# Altium PCB main.PcbDoc (part 1 of 2)
Units mm, origin at the board's own origin, x right, y up, seen from the top; angles counter-clockwise.
Board outline 137 x 49 mm, 4 copper layers (Top Layer, Layer 1, Layer 2, Bottom Layer), stack 0.569 mm thick; 56 components, 56 nets, 326 pads, 215 vias.
Unrouted connection lines stored in the file: 1.
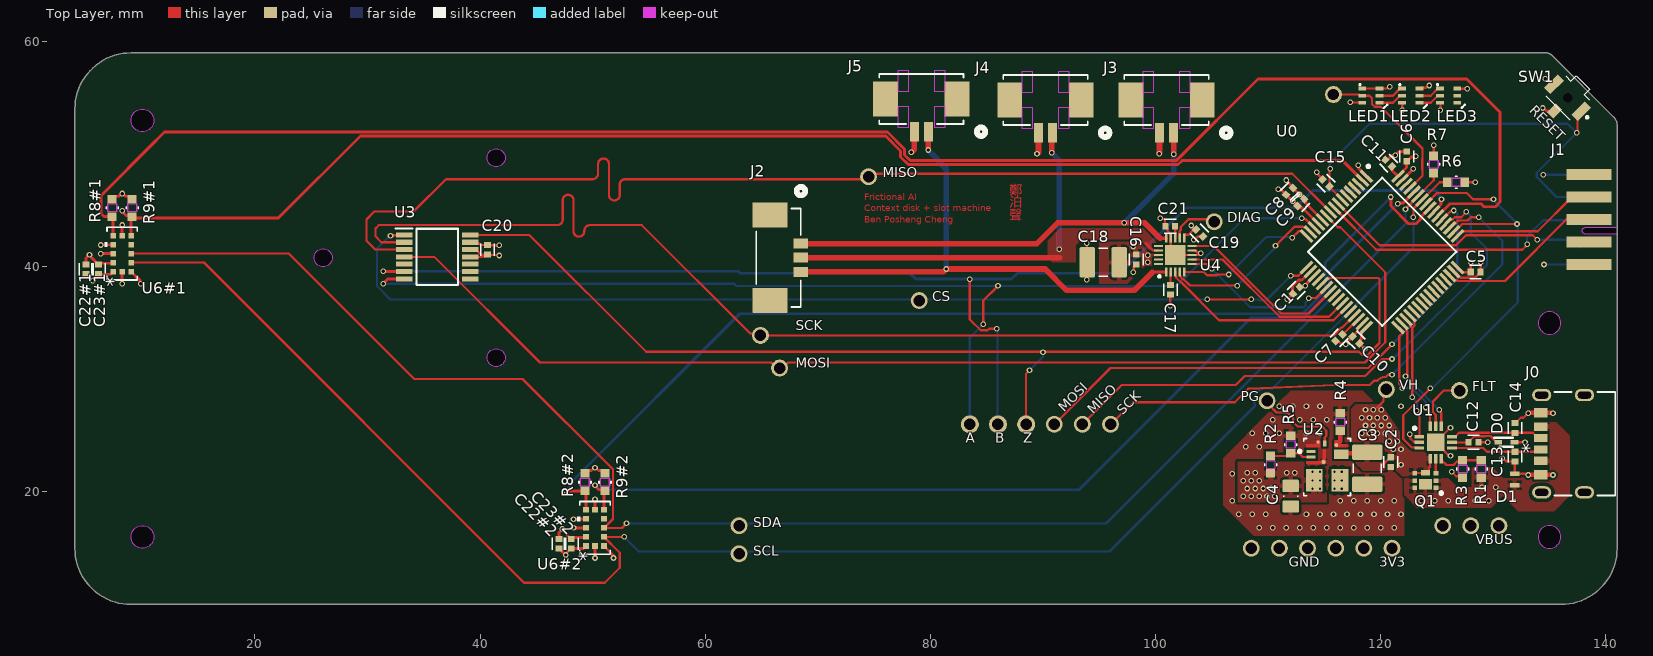
[diagram p0: Top Layer view]
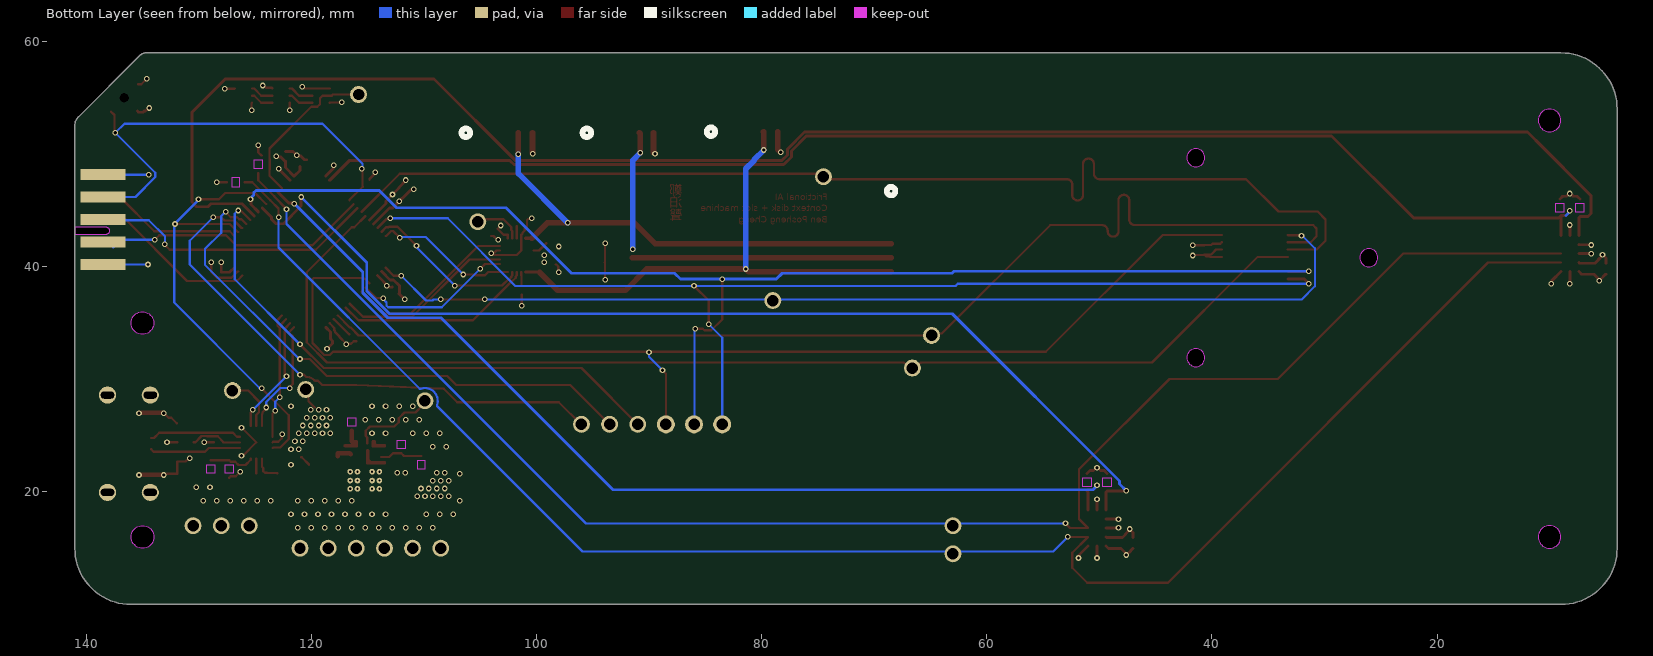
[diagram p1: Bottom Layer view, seen from below]
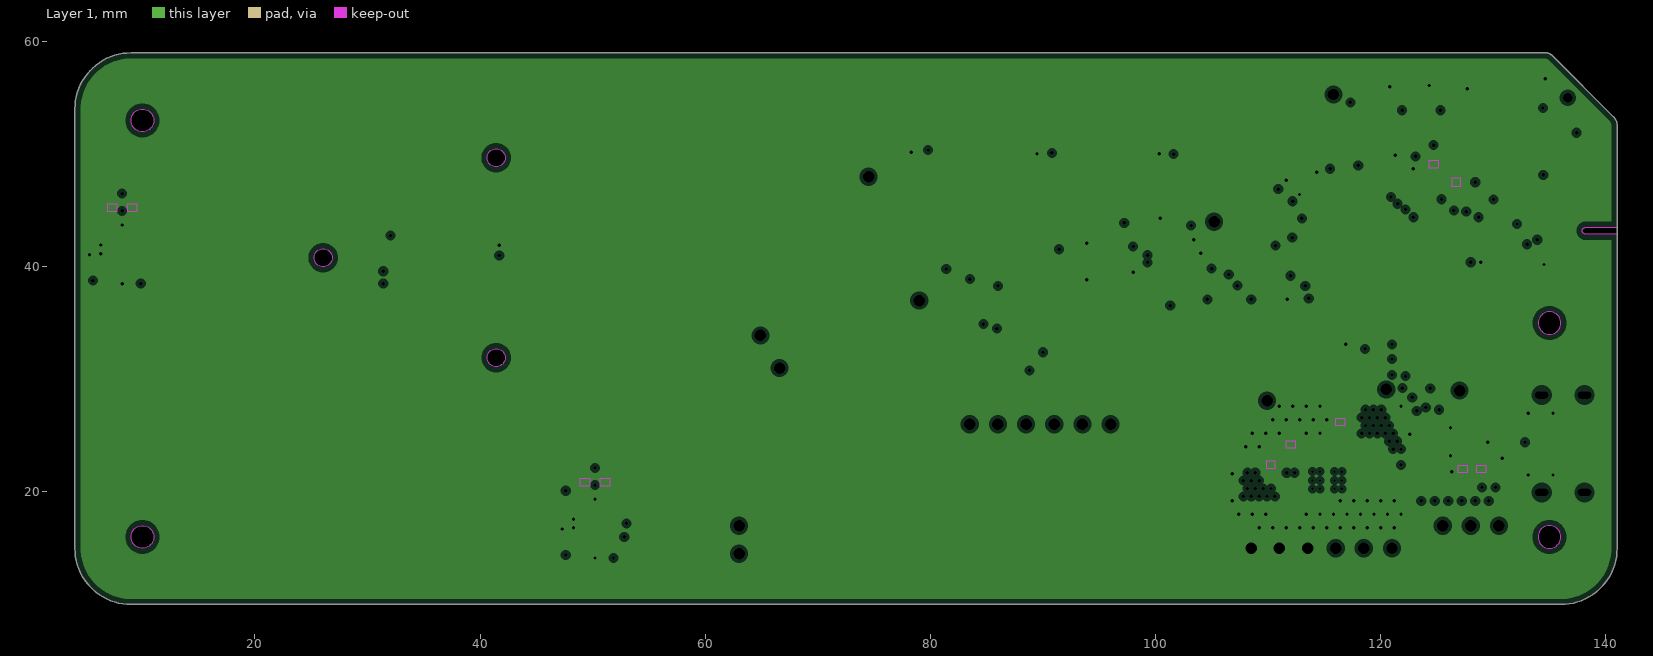
[diagram p2: Layer 1, clearances drawn from the general rule]
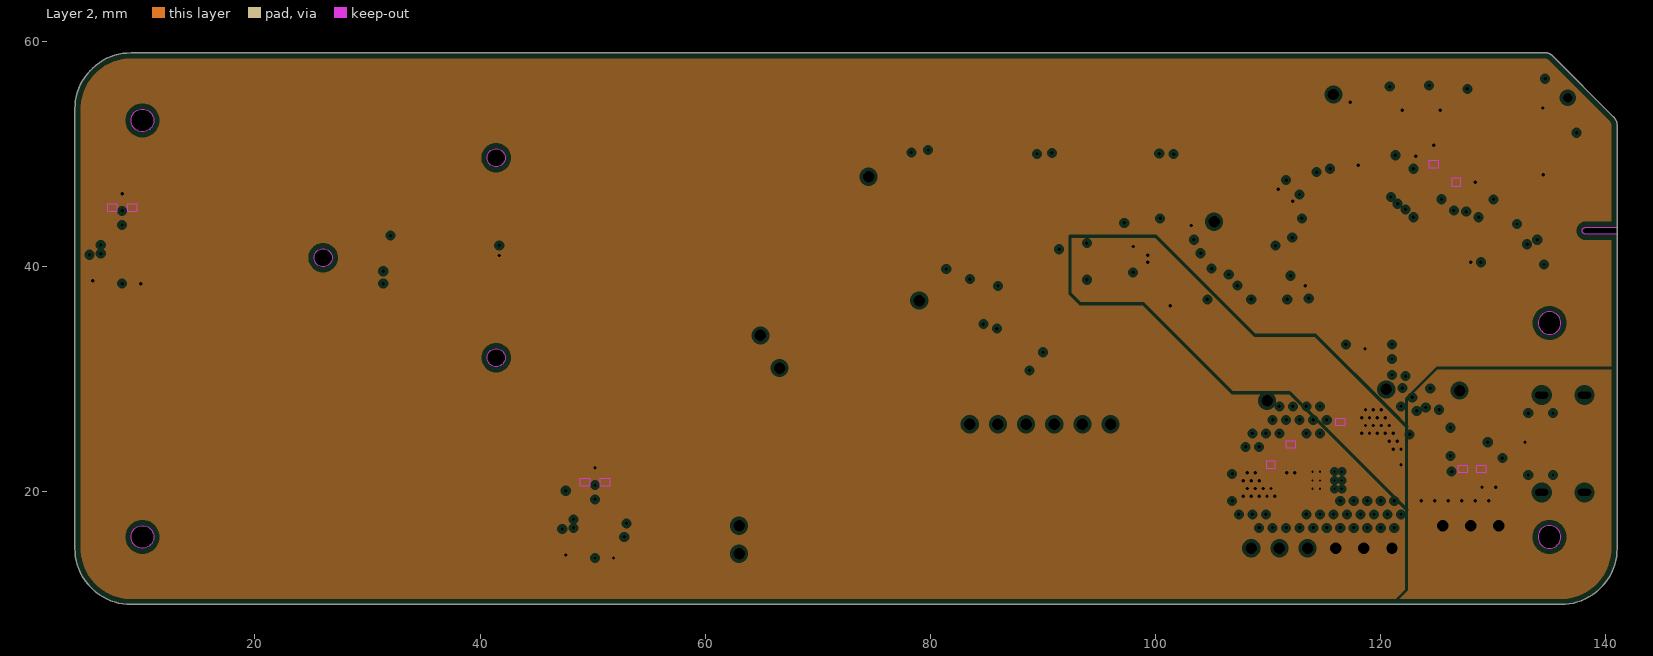
[diagram p3: Layer 2, clearances drawn from the general rule]
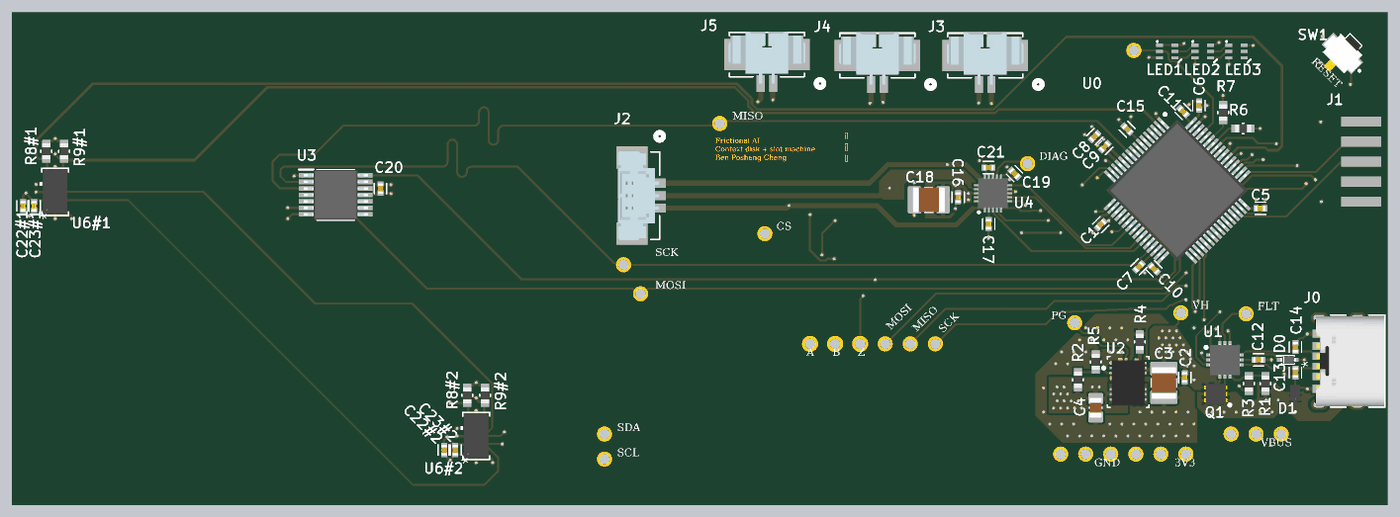
[diagram p4: 3D render of the assembled board from above, using the file's embedded part models]

## Layer stack, top to bottom
Top Solder: solder mask 0.0102, Solder Resist, Dk 3.5
Top Layer: signal copper 0.0356
Dielectric 2: prepreg 0.0711, PP-006, Dk 4.1
Layer 1: plane copper 0.018, net GND
Dielectric 1: dielectric 0.32, FR-4, Dk 4.8
Layer 2: plane copper 0.018, net (Multiple Nets)
Dielectric 5: prepreg 0.0711, PP-006, Dk 4.1
Bottom Layer: signal copper 0.0356
Bottom Solder: solder mask 0.0102, Solder Resist, Dk 3.5

## Board outline
9,10 136,10 ccw(c136,15) 141,15 141,52.559 ccw(c139.934,52.559) 140.688,53.312 135.241,58.759 ccw(c134.659,58.176) 134.659,59 9,59 ccw(c9,54) 4,54 4,15 ccw(c9,15)
cut-out: 10,52 cw(c10,53) 9,53 cw(c10,53) 10,54 cw(c10,53) 11,53 cw(c10,53)
cut-out: 10,15 cw(c10,16) 9,16 cw(c10,16) 10,17 cw(c10,16) 11,16 cw(c10,16)
cut-out: 133.981,15.996 ccw(c134.986,15.996) 134.986,14.991 ccw(c134.986,15.996) 135.991,15.996 ccw(c134.986,15.996) 134.986,17.001 ccw(c134.986,15.996)
cut-out: 134,35 ccw(c135,35) 135,34 ccw(c135,35) 136,35 ccw(c135,35) 135,36 ccw(c135,35)
cut-out: 41.424,31.126 cw(c41.424,31.926) 40.624,31.926 cw(c41.424,31.926) 41.424,32.726 cw(c41.424,31.926) 42.224,31.926 cw(c41.424,31.926)
cut-out: 26.052,40.002 cw(c26.052,40.802) 25.252,40.802 cw(c26.052,40.802) 26.052,41.602 cw(c26.052,40.802) 26.852,40.802 cw(c26.052,40.802)
cut-out: 41.421,48.881 cw(c41.421,49.681) 40.621,49.681 cw(c41.421,49.681) 41.421,50.481 cw(c41.421,49.681) 42.221,49.681 cw(c41.421,49.681)

## Design rules (kind name [scope] priority, off if disabled: settings)
BoardOutlineClearance [All] p1: gap=1 ignorepadtopadclearanceinfootprint=FALSE
Clearance [All] p1: gap=0.2 ignorepadtopadclearanceinfootprint=TRUE except(0.1: Track-Track Track-SMDPad; 0.15: SMDPad-SMDPad; 0.28: Track-THPad Track-Hole; 0.3: THPad-Fill THPad-Poly THPad-Region; 0.45: THPad-THPad)
HoleSize [All] p1: absolutevalues=TRUE maxlimit=6.3 minlimit=0.15 maxpercent=80.000 minpercent=20.000
MatchedLengths I2C [InNet('SCL') or InNet('SDA')] p1: tolerance=8 checknetsindiffpair=FALSE checkdiffpairvsdiffpair=TRUE checkxsignals=TRUE checkothers=TRUE
MatchedLengths SPI [InNetClass('SPI')] p2: tolerance=8 checknetsindiffpair=FALSE checkdiffpairvsdiffpair=TRUE checkxsignals=TRUE checkothers=TRUE
MinimumAnnularRing [not isvia] p1: minimumring=0.2
MinimumSolderMaskSliver [All] p1: minsoldermaskwidth=0.1
PlaneClearance [All] p1: clearance=0.3
PlaneConnect [All] p1: pad.planeconnectstyle=Relief pad.reliefexpansion=0.2 pad.reliefentries=4 pad.reliefconductorwidth=0.3 pad.reliefairgap=0.3 via.planeconnectstyle=Direct via.reliefexpansion=0.508 via.reliefentries=4 via.reliefconductorwidth=0.254 via.reliefairgap=0.254
PolygonConnect PolygonConnect_PWR [InNet('VBUS') or InNet('VH') or InNet('GND')] p1: thpad.connectstyle=Relief thpad.reliefconductorwidth=0.254 thpad.reliefentries=4 thpad.polygonreliefangle="90 Angle" thpad.airgapwidth=0.254 smdpad.connectstyle=Relief smdpad.reliefconductorwidth=0.4 smdpad.reliefentries=4 smdpad.polygonreliefangle="90 Angle" smdpad.airgapwidth=0.2 via.connectstyle=Direct via.reliefconductorwidth=0.254 via.reliefentries=4 via.polygonreliefangle="90 Angle" via.airgapwidth=0.254
PolygonConnect PolygonConnect_3V3 [InNet('3V3')] p2: thpad.connectstyle=Relief thpad.reliefconductorwidth=0.254 thpad.reliefentries=4 thpad.polygonreliefangle="90 Angle" thpad.airgapwidth=0.254 smdpad.connectstyle=Relief smdpad.reliefconductorwidth=0.45 smdpad.reliefentries=4 smdpad.polygonreliefangle="45 Angle" smdpad.airgapwidth=0.2 smdpad.conductorbypadedge=TRUE smdpad.mindistance=0.381 smdpad.enablemindistance=FALSE via.connectstyle=Direct via.reliefconductorwidth=0.254 via.reliefentries=4 via.polygonreliefangle="90 Angle" via.airgapwidth=0.254
PolygonConnect [All] p3: thpad.connectstyle=Relief thpad.reliefconductorwidth=0.254 thpad.reliefentries=4 thpad.polygonreliefangle="90 Angle" thpad.airgapwidth=0.254 smdpad.connectstyle=Relief smdpad.reliefconductorwidth=0.254 smdpad.reliefentries=4 smdpad.polygonreliefangle="90 Angle" smdpad.airgapwidth=0.254 smdpad.conductorbypadedge=TRUE smdpad.mindistance=0.381 smdpad.enablemindistance=FALSE via.connectstyle=Direct via.reliefconductorwidth=0.254 via.reliefentries=4 via.polygonreliefangle="90 Angle" via.airgapwidth=0.254
RoomDefinition TOF1 [InComponentClass('TOF1')] p1: confinementstyle=ConfineIn formatcopy=TRUE lockcomponents=FALSE outline 3.974,37.829 10.197,37.829 10.197,46.973 3.974,46.973
RoomDefinition bldc [InComponentClass('bldc')] p2: confinementstyle=ConfineIn formatcopy=TRUE lockcomponents=FALSE outline 31.985,37.798 31.985,43.956 74.336,57.651 85.385,57.651 107.16,57.556 107.16,50.465 105.428,42.79 104.144,38.632 102.254,36.735 69.728,35.311 63.612,35.311
RoomDefinition power [InComponentClass('power')] p3: confinementstyle=ConfineIn formatcopy=TRUE lockcomponents=FALSE outline 106.8,15.7 141.732,15.7 141.732,59.817 106.8,59.817
RoomDefinition TOF2 [InComponentClass('TOF2')] p4: confinementstyle=ConfineIn formatcopy=TRUE lockcomponents=FALSE outline 45.974,13.462 52.197,13.462 52.197,22.606 45.974,22.606
RoutingVias [All] p1: holewidth=0.3 width=0.5 viastyle="Through Hole" minholewidth=0.15 minwidth=0.25 maxholewidth=0.711 maxwidth=1.27
SilkToSilkClearance [All] p1: silktosilkclearance=0
SilkToSolderMaskClearance [IsPad] p1: minsilkscreentomaskgap=0.15 clearancetoexposedcopper=FALSE
SolderMaskExpansion SolderMaskExpansionVia [IsVia] p1: expansion=0 istentingtop=TRUE
SolderMaskExpansion [All] p2: expansion=0 istentingtop=FALSE
SupplyNets "Schematic Supply Nets_3" [InNet('3V3')] p1: voltage=0.000
SupplyNets "Schematic Supply Nets_2" [InNet('VH')] p2: voltage=0.000
SupplyNets "Schematic Supply Nets_1" [InNet('VBUS')] p3: voltage=0.000
SupplyNets "Schematic Supply Nets" [InNet('GND')] p4: voltage=0.000
Width [All] p1: maxlimit=1 minlimit=0.1 preferedwidth=0.2
24 further rules are at their usual default settings.

## Classes and differential pairs
net class SPI: NetU0_10 NetU0_11 NetU0_29
channel class tof: tof1 tof2
component class tof2: C22#2 C23#2 R8#2 R9#2 U6#2
component class tof1: C22#1 C23#1 R8#1 R9#1 U6#1
component class main: R6 R7
component class POWER: C1 C2 C3 C4 C5 C6 C7 C8 C9 C10 C11 C12 C13 C14 C15 D0 D1 J0 J1 LED1 LED2 LED3 Q1 R1 R2 R3 R4 R5 SW1 U0 U1 U2
component class bldc: C16 C17 C18 C19 C20 C21 J2 J3 J4 J5 U3 U4

## Components (designator, comment, footprint, x,y, rotation, side; value= is the part's Value field where it differs from the comment)
C1 "100n" CAPC1005X55N 112.5,37.9 r45 top
C2 "100n" CAPC1005X55N 120.879,22.649 r90 top
C3 "10u" CAPC3225X270N 118.8,22.1 r90 top
C4 "47u" CAPC2012X145N 111.999,19.623 r90 top
C5 "100n" CAPC1005X55N 128.423,39.53 r180 top
C6 "100n" CAPC1005X55N 122.3,49.8 r270 top
C7 "4.7u" CAPC1005X55N 116.299,33.693 r45 top
C8 "100n" CAPC1005X55N 111.9,46.7 r225 top
C9 "1u" CAPC1005X55N 112.9,45.7 r225 top
C10 "100n" CAPC1005X55N 117.8,33.5 r315 top
C11 "10u" CAPC1005X55N 120.704,49.196 r315 top
C12 "100n" CAPC1005X55N 128.237,24.407 r180 top
C13 "330p" CAPC1005X55N 131.92,23.137 r90 top
C14 "330p" CAPC1005X55N 131.92,25.677 r270 top
C15 "100n" CAPC1005X55N 115.132,47.432 r315 top
C16 "100n" CAPC1005X55N 98.273,40.641 r270 top
C17 "100n" CAPC1005X55N 101.321,37.964 r270 top
C18 "10u" CAPC3225X270N 95.352,40.387 r180 top
C19 "100n" CAPC1005X55N 103.9,43 r135 top
C20 "100n" CAPC1005X55N 40.657,41.511 r270 top
C21 "100n" CAPC1005X55N 101.3,43.6 r0 top
C22#1 "4.7u" CAPC1005X55N 5,39.767 r270 top (schematic designator C22)
C22#2 "4.7u" CAPC1005X55N 47,15.4 r270 top (schematic designator C22)
C23#1 "100n" CAPC1005X55N 6.1,39.767 r270 top (schematic designator C23)
C23#2 "100n" CAPC1005X55N 48.1,15.4 r270 top (schematic designator C23)
D0 "BAT54KFILM" SODFL1608X70N 131.158,24.407 r0 top
D1 "ESDA25P35-1U1M" QFN1610_STM 131.9,21.1 r90 top
J0 "2171750001" 2171750001_MOL 137.254,24.28 r90 top
J1 "STLINKV3MINIE" 009159010061911 135,49.2 r270 top
J2 "533980371" CONN_53398_03_MOL 66.5,40.8 r90 top
J3 "532610271" CONN_532610001-SD_02_MOL 100.975,54.805 r0 top
J4 "532610271" CONN_532610001-SD_02_MOL 90.225,54.805 r0 top
J5 "532610271" CONN_532610001-SD_02_MOL 79.2,54.9 r0 top
LED1 "WS2816A-2121" ws2816a-2121 118.01,52.83 r0 top
LED2 "WS2816A-2121" ws2816a-2121 121.55,52.83 r0 top
LED3 "WS2816A-2121" ws2816a-2121 124.91,52.83 r0 top
Q1 "DMT35M4LFDF" "U-DFN2020-6 (TYPE F)" 125.11,20.15 r90 top
R1 "10k" RC0603N_YAG 128.928,22.036 r90 top
R2 "45.3k" RC0603N_YAG 110.221,22.417 r90 top
R3 "475" RC0603N_YAG 127.277,22.036 r270 top
R4 "18k" RC0603N_YAG 116.4,26.2 r90 top
R5 "10k" RC0603N_YAG 112,24.2 r90 top
R6 "1.5k" RC0603N_YAG 126.7,47.5 r180 top
R7 "1.5k" RC0603N_YAG 124.7,49.1 r270 top
R8#1 "10k" RC0603N_YAG 7.311,45.231 r270 top (schematic designator R8)
R8#2 "10k" RC0603N_YAG 49.311,20.864 r270 top (schematic designator R8)
R9#1 "10k" RC0603N_YAG 9.089,45.231 r270 top (schematic designator R9)
R9#2 "10k" RC0603N_YAG 51.089,20.864 r270 top (schematic designator R9)
SW1 "B3U-3100P-B" B3U3000PB 136.598,55.002 r315 top
U0 "STM32U575RGT3" QFP50P1200X1200X160-64N 120.124,41.329 r315 top
U1 "TCPP01-M12" QFN50P300X300X100-13N-D 124.882,24.399 r0 top
U2 "TPSM84338RCJR" RCJ0009A-MFG 115.245,22.121 r0 top
U3 "AS5047P-ATSM" SOP65P640X120-14N 36.189,40.876 r0 top
U4 "TMC6300-LA" QFN40P300X300X90-21N 101.74,41.036 r90 top
U6#1 "VL53L0CXV0DH/1" LGA12_STM 8.2,41.167 r90 top (schematic designator U6)
U6#2 "VL53L0CXV0DH/1" LGA12_STM 50.2,16.8 r90 top (schematic designator U6)

## Footprints (in the part's own frame and the unit in brackets; to place one, negate y for a bottom-side part, rotate by r counter-clockwise, add the part's x,y. Pads: shape width x height; smd on the part's side, far side on the other; paste and mask are expansions set on the pad)
2171750001_MOL [mil]
  oval 43x67 / inner oval 43x67 / far side round 60 hole 47 slot 24 at 0 deg paste-99999 mask-33.5: 7(-170.08,116.31) 8(170.08,116.31) 9(-170.08,-33.29) 10(170.08,-33.29)
  rect 28x47 smd paste+0 mask+0: A5(-19.68,119.46) B5(19.69,119.46)
  rect 30x47 smd paste+0 mask+0: A9(59.84,119.46) B9(-59.84,119.46)
  rect 32x47 smd paste+0 mask+0: A12(108.27,119.46) B12(-108.27,119.46)
  silkscreen extent -181,-141 181,71, body extent -176,-139 176,133, height 125
009159010061911 [mm]
  rect 1x4 smd: 1(9,3.5) 2(7,3.5) 3(5,3.5) 4(3,3.5) 5(1,3.5)
  rect 1x4 smd far side: 6(9,3.5) 7(7,3.5) 8(5,3.5) 9(3,3.5) 10(1,3.5)
  Keep-Out Layer board cut-out: 5.7,6 6.3,6 6.3,3.2 6.27,3.07 6.187,2.965 6.067,2.908 5.933,2.908 5.813,2.965 5.73,3.07 5.7,3.2 5.7,3.2
B3U3000PB [mm]
  rect 0.8x1.7 smd: 1(1.7,0) 2(-1.7,0)
  rect 0.8x1.1 / inner round 0 / far side round 0 all layers, no hole: 3(0,-1.65)
  round 0.425 hole 0.85 unplated: 4(0,0)
  silkscreen extent -1.5,-1.25 2.55,1.95, body extent -1.97,-1.3 2.03,1.91, height 1.2
CAPC1005X55N [mm]
  rect 0.54x0.6 smd: 1(-0.43,0) 2(0.43,0)
  silkscreen extent -0.53,-0.62 0.53,0.62, body extent -0.51,-0.28 0.54,0.28, height 0.56
CAPC2012X145N [mm]
  rrect25% 1.1x1.48 smd: 1(-0.915,0) 2(0.915,0)
  silkscreen extent -0.05,-0.63 0.05,0.63, body extent -1,-0.63 1,0.63, height 1.45
CAPC3225X270N [mm]
  rrect25% 1.37x2.72 smd: 1(-1.42,0) 2(1.42,0)
  silkscreen extent -0.42,-1.25 0.42,1.25, body extent -1.6,-1.25 1.6,1.25, height 2.7
CONN_53398_03_MOL [mil]
  rect 35x51 smd paste+0 mask+0: 1(49.21,-78.57) 2(0,-78.57) 3(-49.21,-78.57)
  rect 87x122 smd paste+0 mask+0: 4(-149.61,29.69) 5(149.61,29.69)
  silkscreen extent -172,-94 248,78, body extent -175,-80 175,85, height 185
CONN_532610001-SD_02_MOL [mil]
  rect 32x67 smd paste+0 mask+0: 1(24.61,-114.35) 2(-24.61,-114.35)
  rect 87x122 smd paste+0 mask+0: 3(-125,-0.18) 4(125,-0.18)
  Top Layer keep-out region: 83.48,-27.67 44.48,-27.67 44.48,-98.67 83.48,-98.67
  Top Layer keep-out region: -44.48,-27.67 -83.48,-27.67 -83.48,-98.67 -44.48,-98.67
  Top Layer keep-out region: 83.48,98.32 44.48,98.32 44.48,27.32 83.48,27.32
  Top Layer keep-out region: -44.48,98.32 -83.48,98.32 -83.48,27.32 -44.48,27.32
  silkscreen extent -148,-129 223,88, body extent -151,-115 151,90, height 126
LGA12_STM [mm]
  rect 0.5x0.5 smd paste+0 mask+0: 1(-1.6,0.8) 2(-0.8,0.8) 3(0,0.8) 4(0.8,0.8) 5(1.6,0.8) 6(1.6,0) 7(1.6,-0.8) 8(0.8,-0.8) 9(0,-0.8) 10(-0.8,-0.8) 11(-1.6,-0.8) 12(-1.6,0)
  silkscreen extent -2.35,-1.35 2.35,1.56, body extent -2.22,-1.22 2.22,1.22, height 1.04
QFN40P300X300X90-21N [mm]
  rect 0.8x0.2 smd: 1(-1.5,0.8) 2(-1.5,0.4) 3(-1.5,0) 4(-1.5,-0.4) 5(-1.5,-0.8) 11(1.5,-0.8) 12(1.5,-0.4) 13(1.5,0) 14(1.5,0.4) 15(1.5,0.8)
  rect 0.2x0.8 smd: 6(-0.8,-1.5) 7(-0.4,-1.5) 8(0,-1.5) 9(0.4,-1.5) 10(0.8,-1.5) 16(0.8,1.5) 17(0.4,1.5) 18(0,1.5) 19(-0.4,1.5) 20(-0.8,1.5)
  rect 1.8x1.8 smd: 21(0,0)
  silkscreen extent -2,1.3 -1.8,1.5, body extent -1.55,-1.55 1.55,1.55, height 0.9
QFN50P300X300X100-13N-D [mm]
  rect 0.85x0.3 smd: 1(-1.45,0.5) 2(-1.45,0) 3(-1.45,-0.5) 7(1.45,-0.5) 8(1.45,0) 9(1.45,0.5)
  rect 0.3x0.85 smd: 4(-0.5,-1.45) 5(0,-1.45) 6(0.5,-1.45) 10(0.5,1.45) 11(0,1.45) 12(-0.5,1.45)
  rect 1.55x1.55 smd: 13(0,0)
  silkscreen extent -2,1.13 -1.75,1.37, body extent -1.55,-1.55 1.55,1.55, height 1
QFN1610_STM [mil]
  rect 16x33 smd paste+0 mask+0: 1(-20.5,0) 2(20.5,0)
  silkscreen extent -77,-3 -71,3, body extent -31,-19 31,19, height 24
QFP50P1200X1200X160-64N [mm]
  rect 1.475x0.3 smd: 1(-5.738,3.75) 2(-5.738,3.25) 3(-5.738,2.75) 4(-5.738,2.25) 5(-5.738,1.75) 6(-5.738,1.25) 7(-5.738,0.75) 8(-5.738,0.25) 9(-5.738,-0.25) 10(-5.738,-0.75) 11(-5.738,-1.25) 12(-5.738,-1.75) 13(-5.738,-2.25) 14(-5.738,-2.75) 15(-5.738,-3.25) 16(-5.738,-3.75) 33(5.738,-3.75) 34(5.738,-3.25) 35(5.738,-2.75) 36(5.738,-2.25) 37(5.738,-1.75) 38(5.738,-1.25) 39(5.738,-0.75) 40(5.738,-0.25) 41(5.738,0.25) 42(5.738,0.75) 43(5.738,1.25) 44(5.738,1.75) 45(5.738,2.25) 46(5.738,2.75) 47(5.738,3.25) 48(5.738,3.75)
  rect 0.3x1.475 smd: 17(-3.75,-5.738) 18(-3.25,-5.738) 19(-2.75,-5.738) 20(-2.25,-5.738) 21(-1.75,-5.738) 22(-1.25,-5.738) 23(-0.75,-5.738) 24(-0.25,-5.738) 25(0.25,-5.738) 26(0.75,-5.738) 27(1.25,-5.738) 28(1.75,-5.738) 29(2.25,-5.738) 30(2.75,-5.738) 31(3.25,-5.738) 32(3.75,-5.738) 49(3.75,5.738) 50(3.25,5.738) 51(2.75,5.738) 52(2.25,5.738) 53(1.75,5.738) 54(1.25,5.738) 55(0.75,5.738) 56(0.25,5.738) 57(-0.25,5.738) 58(-0.75,5.738) 59(-1.25,5.738) 60(-1.75,5.738) 61(-2.25,5.738) 62(-2.75,5.738) 63(-3.25,5.738) 64(-3.75,5.738)
  silkscreen extent -6.35,-4.65 4.65,4.65, body extent -6,-6 6,6, height 1.6
RC0603N_YAG [mil]
  rect 30x32 smd paste+0 mask+0: 1(-30.5,0) 2(30.5,0)
  Top Layer keep-out region: -13.5,-14 -13.5,14 13.5,14 13.5,-14
  Keep-Out Layer region: -13.5,-16 -13.5,16 13.5,16 13.5,-16
  silkscreen extent -3,-21 3,21, body extent -31,-16 31,16, height 28
RCJ0009A-MFG [mm]
  rect 0.8x0.25 smd paste+0 mask-0.381: 1(-1.45,1.475) 2(-1.45,0.975)
  round 0.348 smd paste-0.161 mask-0.165: 3(-0.319,0.532)
  round 0.5 / inner round 1.524 / far side round 0.5 hole 0.203 paste-2539.97 mask-0.241: 4(-1.3,-1.85) 4(-1.3,-1.113) 4(-1.3,-0.325) 4(-0.65,-1.85) 4(-0.65,-1.113) 4(-0.65,-0.325) 5(0.65,-1.85) 5(0.65,-1.113) 5(0.65,-0.325) 5(1.3,-1.85) 5(1.3,-1.113) 5(1.3,-0.325)
  rect 1.5x2.025 smd paste-1 mask-1.003: 4(-1.15,-1.088) 5(1.15,-1.088)
  rect 1.3x0.85 smd paste-0.637 mask-0.635: 6(1.25,1.225)
  round 0.337 smd paste+0 mask-0.152: 7(0.812,2.037)
  rect 0.3x0.55 smd paste+0 mask-0.267: 8(-0.225,2.175)
  round 0.27 smd paste+0 mask-0.127: 9(-0.8,2.3)
  Top Layer region: -0.675,1.85 -1.8,1.85 -1.85,1.9 -1.85,2.05 -1.8,2.1 -1.075,2.1 -0.975,2.2 -0.975,2.4 -0.925,2.45 -0.675,2.45 -0.625,2.4 -0.625,1.9
  Top Layer region: -0.175,0.326 -1.8,0.325 -1.85,0.375 -1.85,0.55 -1.8,0.6 -0.606,0.6 -0.536,0.63 -0.404,0.761 -0.375,0.832 -0.375,1.6 -0.325,1.65 -0.175,1.65 -0.125,1.6 -0.125,0.376
  Top Layer region: 0.675,1.85 1.8,1.85 1.85,1.9 1.85,2.05 1.8,2.1 1.075,2.1 0.975,2.2 0.975,2.4 0.925,2.45 0.675,2.45 0.625,2.4 0.625,1.9
  silkscreen extent -2.57,-2.47 2.07,2.63, body extent -1.65,-2.25 1.65,2.25, height 2.05
SODFL1608X70N [mm]
  rect 0.7x0.42 smd: 1(-0.725,0) 2(0.725,0)
  silkscreen extent -1.07,-0.4 0.6,0.4, body extent -0.76,-0.4 0.84,0.4, height 0.7
SOP65P640X120-14N [mm]
  rect 1.475x0.45 smd: 1(-2.938,1.95) 2(-2.938,1.3) 3(-2.938,0.65) 4(-2.938,0) 5(-2.938,-0.65) 6(-2.938,-1.3) 7(-2.938,-1.95) 8(2.938,-1.95) 9(2.938,-1.3) 10(2.938,-0.65) 11(2.938,0) 12(2.938,0.65) 13(2.938,1.3) 14(2.938,1.95)
  silkscreen extent -3.67,-2.5 1.85,2.52, body extent -3.2,-2.5 3.2,2.5, height 1.2
"U-DFN2020-6 (TYPE F)" [mm]
  rect 0.4x0.425 / inner rect 0x0 / far side rect 0x0 all layers, no hole: D(0.2,2.09) D(0.2,0.21) D(0.85,2.09) D(0.85,0.21) G(1.5,0.21) S(1.5,2.09)
  rect 0.95x1.15 / inner rect 0x0 / far side rect 0x0 all layers, no hole mask+0: D(0.52,1.15)
  rect 0.48x0.8 / inner rect 0x0 / far side rect 0x0 all layers, no hole: S(1.54,1.15)
  silkscreen extent -0.38,-0.38 -0.13,-0.13, body extent -0.15,0.15 1.85,2.15, height 0.6
ws2816a-2121 [mm]
  rect 0.7x0.32 smd: 1(0.35,3) 2(0.35,2.37) 3(0.35,1.74) 4(1.89,1.74) 5(1.89,2.37) 6(1.89,3)
  silkscreen extent 0.12,1.27 2.56,3.37

## Part data
C1 C2 C5 C6 C8 C10 C12 C15 C16 C17 C19 C20 C21 C23#1 C23#2: library part UMK105B7104KVHF, "CAP CER 0.1UF 50V X7R 0402", Package=None, Availability=Unavailable, Manufacturer_Part_Number=UMK105B7104KVHF, MF="{'manufacturer': u'Taiyo Yuden'}", MP=UMK105B7104KVHF, Price=None
C3 C18: library part MSASU32MSB5106KPNA01, "CAP CER 10UF 50V X5R 1210", Package=None, Availability=Unavailable, Manufacturer_Part_Number=MSASU32MSB5106KPNA01, MF="{'manufacturer': u'Taiyo Yuden'}", MP=MSASU32MSB5106KPNA01, Price=None
C4: library part MSASL21GBB5476MTNA01, "CAP CER 47UF 10V X5R 0805", Package=None, Availability=Unavailable, Manufacturer_Part_Number=MSASL21GBB5476MTNA01, MF="{'manufacturer': u'Taiyo Yuden'}", MP=MSASL21GBB5476MTNA01, Price=None
C7 C22#1 C22#2: library part GRM155R60J475M, "CAP CER 4.7UF 6.3V X5R 0402", Package=None, Availability=Unavailable, Manufacturer_Part_Number=GRM155R60J475M, MF="{'manufacturer': u'Taiyo Yuden'}", MP=GRM155R60J475M, Price=None
C9: library part GRM155R60J105K, "CAP CER 1UF 6.3V X5R 0402", Package=None, Availability=Unavailable, Manufacturer_Part_Number=GRM155R60J105K, MF="{'manufacturer': u'Taiyo Yuden'}", MP=GRM155R60J105K, Price=None
C11: library part GRM155R60J106M, "CAP CER 10UF 6.3V X5R 0402", Package=None, Availability=Unavailable, Manufacturer_Part_Number=GRM155R60J106M, MF="{'manufacturer': u'Taiyo Yuden'}", MP=GRM155R60J106M, Price=None
C13 C14: library part MCASU105SCG331JFNA01, "CAP CER 330PF 50V C0G 0402", Package=None, Availability=Unavailable, Manufacturer_Part_Number=MCASU105SCG331JFNA01, MF="{'manufacturer': u'Taiyo Yuden'}", MP=MCASU105SCG331JFNA01, Price=None
D0: "BAT54KFILM, Schottky Diode,  0.3A max, 40V 5ns, 2-Pin, SOD-523", Manufacturer_Name=STMicroelectronics, Mouser Part Number=511-BAT54KFILM, Arrow Part Number=BAT54KFILM, Arrow Price/Stock=https://www.arrow.com/en/products/bat54kfilm/stmicroelectronics?region=europe, Datasheet Link=https://www.st.com/resource/en/datasheet/bat54.pdf, Geometry.Height=0.7mm, Manufacturer_Part_Number=BAT54KFILM, Mouser Price/Stock=https://www.mouser.co.uk/ProductDetail/STMicroelectronics/BAT54KFILM?qs=jZi1jxfVU95Y9ce6l3OT%252BA%3D%3D
D1: "35 A - 8/20 us, 22 V TVS in QFN-2L", Manufacturer_Name=STMicroelectronics, Copyright="Copyright (C) 2026 Ultra Librarian. All rights reserved.", Manufacturer_Part_Number=ESDA25P35-1U1M, RefDes=RefDes, Type=Type
J0: "Universal Serial Bus (USB) Shielded I/O Receptacle, Type C, Right-Angle,  Surface Mount, Top Mount, 6 Circuits, Gold (Au) Plating", Manufacturer_Name="Molex Connector Corporation", Copyright="Copyright (C) 2025 Ultra Librarian. All rights reserved.", Manufacturer_Part_Number=2171750001, RefDes=RefDes, Type=Type
J1: library part 009159010061911, "KYOCERA-AVX 009159010061911"
J2: "1.25mm Pitch, PicoBlade PCB Header, Single Row, Vertical, Surface Mount,  Tin (Sn) Plating, Friction Lock, 3 Circuits, Tape and Reel, 0.60mm PC Tail Length", Manufacturer_Name="Molex Connector Corporation", Copyright="Copyright (C) 2025 Ultra Librarian. All rights reserved.", Manufacturer_Part_Number=533980371, RefDes=RefDes, Type=Type
J3 J4 J5: "1.25mm Pitch, PicoBlade PCB Header, Single Row, Right-Angle, Surface Mount, Tin (Sn) Plating, Friction Lock, 2 Circuits, Natural, Tape and Reel", Manufacturer_Name="Molex Connector Corporation", Copyright="Copyright (C) 2025 Ultra Librarian. All rights reserved.", Manufacturer_Part_Number=532610271, RefDes=RefDes, Type=Type
R1 R5 R8#1 R8#2 R9#1 R9#2: library part RT0603BRD0710KL, "10K OHM 0.1% 1/10W 0603", Manufacturer_Name=Yageo, Copyright="Copyright (C) 2026 Ultra Librarian. All rights reserved.", Manufacturer_Part_Number=RT0603BRD0710KL
R2: library part RT0603BRD0745K3L, "45.3K OHM 0.1% 1/10W 0603", Manufacturer_Name=Yageo, Copyright="Copyright (C) 2026 Ultra Librarian. All rights reserved.", Manufacturer_Part_Number=RT0603BRD0745K3L
R3: library part RT0603BRE07475RL, "475 OHM 0.1% 1/10W 0603", Manufacturer_Name=Yageo, Copyright="Copyright (C) 2026 Ultra Librarian. All rights reserved.", Manufacturer_Part_Number=RT0603BRE07475RL
R4: library part RT0603BRD0718KL, "18K OHM 0.1% 1/10W 0603", Manufacturer_Name=Yageo, Copyright="Copyright (C) 2026 Ultra Librarian. All rights reserved.", Manufacturer_Part_Number=RT0603BRD0718KL
R6 R7: library part RC0603FR-071K5L, "1.5K OHM 1% 1/10W 0603", Manufacturer_Name=Yageo, Copyright="Copyright (C) 2026 Ultra Librarian. All rights reserved.", Manufacturer_Part_Number=RC0603FR-071K5L
SW1: "OMRON - B3U-3100P-B - TACTILE SWITCH, SIDE ACTUATED, SMD", Arrow Part Number=B3U-3000P-B, Manufacturer_Name="OMRON Electronics", Mouser Part Number=653-B3U-3000P-B, Arrow Price/Stock=https://www.arrow.com/en/products/b3u-3000p-b/omron?utm_currency=USD&region=nac, Datasheet Link=https://componentsearchengine.com/Datasheets/2/B3U-3000P-B.pdf, Geometry.Height=1.35mm, Manufacturer_Part_Number=B3U-3100P-B, Mouser Price/Stock=https://www.mouser.co.uk/ProductDetail/Omron-Electronics/B3U-3000P-B?qs=AO7BQMcsEu4JAdtnbsGArA%3D%3D
U0: "Ultra-low-power Arm Cortex-M33 32-bit MCU+TrustZone+FPU, 240 DMIPS, up to 2 MB Flash memory, 786 KB SRAM", Manufacturer_Name=STMicroelectronics, Datasheet Link=https://www.st.com/resource/en/datasheet/stm32u575ag.pdf, Geometry.Height=1.6mm, Manufacturer_Part_Number=STM32U575RGT3
U1: "USB Type-C and power delivery protection for sink application", Manufacturer_Name=STMicroelectronics, Mouser Part Number=511-TCPP01-M12, Arrow Part Number=TCPP01-M12, Arrow Price/Stock=https://www.arrow.com/en/products/tcpp01-m12/stmicroelectronics.html?utm_currency=USD&region=europe, Datasheet Link=https://www.st.com/resource/en/datasheet/tcpp01-m12.pdf, Geometry.Height=1mm, Manufacturer_Part_Number=TCPP01-M12, Mouser Price/Stock=https://www.mouser.co.uk/ProductDetail/STMicroelectronics/TCPP01-M12?qs=%252B6g0mu59x7KCafIwapwG2A%3D%3D
U2: "3.8-V to 28-V Input, 3A, 200kHz-2.2MHz synchronous step-down power module 9-QFN-FCMOD -40 to 125", Manufacturer_Name="Texas Instruments", Copyright="Copyright (C) 2025 Ultra Librarian. All rights reserved.", Manufacturer_Part_Number=TPSM84338RCJR, RefDes=RefDes, Type=TYPE
U3: "Board Mount Hall Effect / Magnetic Sensors 14 bit core res Up to 28krpm", Manufacturer_Name="ams OSRAM", Mouser Part Number=985-AS5047P-ATSM, Datasheet Link=https://datasheet.datasheetarchive.com/originals/distributors/DKDS-7/120640.pdf, Geometry.Height=1.2mm, Manufacturer_Part_Number=AS5047P-ATSM, Mouser Price/Stock=https://www.mouser.co.uk/ProductDetail/ams-OSRAM/AS5047P-ATSM?qs=cGEy3R83DS8fzNOVLHtOgg%3D%3D
U4: "Highly Efficient Low Voltage, Zero Standby Current Driver for 3-Phase BLDC/PMSM Motors up to 2A peak, Triple Half-Bridge with separate HS and LS control signals", Manufacturer_Name="Analog Devices", Mouser Part Number=700-TMC6300-LA, Arrow Part Number=TMC6300-LA, Arrow Price/Stock=https://www.arrow.com/en/products/tmc6300-la/analog-devices?region=nac, Datasheet Link=https://www.analog.com/TMC6300/datasheet, Geometry.Height=0.9mm, Manufacturer_Part_Number=TMC6300-LA, Mouser Price/Stock=https://www.mouser.co.uk/ProductDetail/ADI-Trinamic/TMC6300-LA?qs=QNEnbhJQKvYIagO3WUG%252BYg%3D%3D
U6#1 U6#2: library part VL53L0CXV0DH1, "Time-of-Flight (ToF) ranging sensor", Manufacturer_Name=STMicroelectronics, Copyright="Copyright (C) 2026 Ultra Librarian. All rights reserved.", Manufacturer_Part_Number=VL53L0CXV0DH/1, RefDes=RefDes, Type=Type
LED1 LED2 LED3: Manufacturer_Part_Number=WS2816A-2121
Q1: Manufacturer_Part_Number=DMT35M4LFDF

## Free pads (board coordinates)
  round 1.5 hole 1.02: TP0(109.9,28.1) TP0(127,29) TP1(115.8,55.3) TP2(105.2,44) TP3(125.5,17) TP4(128,17) TP5(130.5,17) TP6(120.5,29.1) TP7(121,15) TP8(118.5,15) TP9(116,15) TP10(113.5,15) TP11(111,15) TP12(108.5,15) TP13(63,17) TP14(63,14.5) TP15(74.5,48) TP16(64.9,33.9) TP17(66.6,31) TP18(79,37) TP19(91,26) TP20(93.5,26) TP21(96,26)
  round 1.6 hole 1.02: TP22(88.5,26) TP23(83.5,26) TP24(86,26)

## Via types
v1: diameter 0.5, hole 0.3, Top Layer to Bottom Layer, tented both sides, 215 vias

## Nets (pads, with @x,y where several pads share a name; then routed paths per layer and width w, separated by ;. In a path a pad name is that pad's centre, name@x,y a point inside that pad or via, vN(x,y) a via of type N, cw(c..) or ccw(c..) an arc to the next point about the centre after c; other vN are vias at no path point)
3V3: C1.2 C4.2 C5.2 C6.2 C8.2 C9.2 C10.2 C11.2 C19.2 C20.2 C22#1.2 C22#2.2 C23#1.2 C23#2.2 J1.10 LED1.3 LED2.3 LED3.3 pad.TP7 pad.TP8 pad.TP9 R2.1 R6.1 R7.1 R8#1.1 R8#2.1 R9#1.1 R9#2.1 SW1.3 U0.1 U0.13 U0.19 U0.32 U0.48 U0.64 U2.4 U3.11 U3.12 U4.11 U6#1.1 U6#1.11 U6#2.1 U6#2.11 | length 45.5
  Top Layer w0.2: U3.11 40.165,40.876 40.2,40.912 40.487,40.912 C20.2 ; U3.12 39.64,41.527 39.765,41.401 39.765,41.374 40.057,41.082 C20.2 ; v1(41.7,41) 41.659,41.041 40.698,41.041 C20.2 ; U4.11 102.54,42.836 102.918,42.836 103.43,43.349 103.43,43.368 103.152,43.646 v1(103.152,43.665) ; v1(117.3,54.6) 117.315,54.585 118.345,54.585 LED1.3 ; v1(121.9,53.9) LED2.3 ; R7.1@124.4,49.875 124.419,49.875 124.7,50.156 v1(124.7,50.8) ; LED3.3 125.3,54.53 v1(125.3,53.9) ; R6.1 v1(128.4,47.5)
  Top Layer w0.254: C22#1.2 5.03,39.337 5.21,39.157 5.21,39.127 5.57,38.767 v1(5.6,38.767) 5.6,38.834 5.681,38.915 5.681,38.948 6.07,39.337 C23#1.2 7.17,39.337 U6#1.1 ; R8#1.1 7.565,46.26 7.892,46.26 8.133,46.501 v1(8.2,46.501) 8.267,46.501 8.508,46.26 8.835,46.26 R9#1.1 ; U6#1.11 9.804,38.763 9.804,38.547 v1(9.851,38.5) ; C22#2.2 47.03,14.97 47.21,14.79 47.21,14.76 47.57,14.4 v1(47.6,14.4) 47.6,14.467 47.681,14.548 47.681,14.581 48.07,14.97 C23#2.2 49.17,14.97 U6#2.1 ; R8#2.1 49.565,21.893 49.892,21.893 50.133,22.134 v1(50.2,22.134) 50.267,22.134 50.508,21.893 50.835,21.893 R9#2.1 ; U6#2.11 51.804,14.396 51.804,14.18 v1(51.851,14.133) ; v1(110.9,46.9) 110.957,46.843 111.149,46.843 C8.2 v1(112.178,45.814) 112.759,45.233 113.038,45.233 U0.13 ; C1.2 112.825,38.183 113.089,38.183 U0.19 ; v1(118,49) 118.047,48.953 118.047,48.742 118.718,48.07 U0.1 ; v1(118.6,32.7) C10.2 118.104,33.398 118.303,33.597 118.303,34.204 U0.32 ; C11.2 120.987,48.871 120.987,48.63 121.008,48.609 121.008,48.559 U0.64 122.3,48.808 C6.2 122.33,49.37 122.713,49.753 123.053,49.753 v1(123.1,49.8) ; U0.48 127.249,39.508 127.97,39.508 C5.2 127.996,39.533 127.996,40.396 v1(128,40.4) ; v1(134.4,54.1) 134.467,54.1 134.731,53.835 134.833,53.835 134.939,53.729 135.325,53.729 SW1.3
  Bottom Layer w0.2: v1(134.439,48.161) 138.461,48.161 J1.10
  other v1: 107.8,19.6 108.5,19.6 109.2,19.6 109.9,19.6 110.6,19.6 108.15,20.3 108.85,20.3 109.55,20.3 110.25,20.3 107.8,21 108.5,21 109.2,21 108.15,21.7 108.85,21.7 111.65,21.7 112.35,21.7 113.3,38.3
A: pad.TP23 U0.14 U3.7 | length 101
  Top Layer w0.2: v1(84.7,34.9) 84.7,37 v1(86,38.3) ; v1(113,44.3) 113.057,44.243 113.321,44.243 U0.14
  Top Layer w0.254: v1(31.4,38.5) 31.826,38.926 U3.7
  Bottom Layer w0.2: v1(31.4,38.5) 62.579,38.5 62.779,38.3 v1(86,38.3) 101.878,38.3 107.878,44.3 v1(113,44.3) ; pad.TP23 83.5,33.7 v1(84.7,34.9)
B: pad.TP24 U0.55 U3.6 | length 116.3
  Top Layer w0.2: v1(83.5,38.9) 83.5,35.322 84.472,34.35 85.071,34.35 85.221,34.5 v1(85.9,34.5)
  Top Layer w0.254: v1(31.4,39.6) 31.424,39.576 U3.6 ; U0.55 124.712,44.888 125.353,45.529 125.353,45.953 v1(125.4,46)
  Bottom Layer w0.2: v1(85.9,34.5) 85.95,34.45 85.95,26.05 pad.TP24
  Bottom Layer w0.254: v1(31.4,39.6) 62.906,39.6 63.079,39.427 78.166,39.427 78.693,38.9 v1(83.5,38.9) 87.199,38.9 87.726,39.427 96.879,39.427 102.689,45.237 112.419,45.237 113.959,46.777 124.923,46.777 125.103,46.597 125.103,46.364 125.4,46.067 v1(125.4,46)
CC1: U0.50 U0.57 U1.3 | length 40.8
  Top Layer w0.2: U1.3 123.382,23.949 122.751,23.949 122,24.7 122,26.8 v1@124.457,29.257 ; U0.57 124.992,46.55 127.65,46.55 128.2,46 130,46 v1(130.019,45.98) ; U0.50 126.523,43.088 127.235,43.8 v1(132.1,43.8)
  Bottom Layer w0.2: v1@124.457,29.257 124.625,29.257 132.181,36.814 132.181,43.533 132.157,43.556 132.157,43.743 v1(132.1,43.8) 132.1,43.85 130.019,45.93 v1(130.019,45.98)
  other v1: 124.4,29.2
CC2: U0.35 U0.36 U1.1 | length 12.3
  Top Layer w0.2: U0.35 122.652,34.911 122.652,34.699 122.8,34.552 ; U0.36 123.006,35.265 123.006,34.757 122.8,34.552 ; v1(122.8,28.4) 122.8,34.552 ; v1(123.2,27.2) 123.432,26.968 U1.1
  Bottom Layer w0.2: v1(122.8,28.4) 123.2,28 v1(123.2,27.2)
DIAG: pad.TP2 U4.12 | length 4.4
  Top Layer w0.2: U4.12 102.14,43.157 102.24,43.257 102.24,43.531 102.924,44.215 104.985,44.215 pad.TP2
FLT: pad.TP0@127,29 U1.11 | length 5
  Top Layer w0.2: U1.11 124.882,26.83 124.641,27.072 124.641,28.041 125.6,29 pad.TP0@127,29
GND: C1.1 C2.1 C3.1 C4.1 C5.1 C6.1 C7.1 C8.1 C9.1 C10.1 C11.1 C12.1 C13.1 C14.1 C15.1 C16.2 C18.2 C19.1 C20.1 C21.1 C22#1.1 C22#2.1 C23#1.1 C23#2.1 D1.2 J0.A12 J0.B12 J1.6 J3.2 J4.2 J5.2 LED1.1 LED1.6 LED2.6 LED3.6 pad.TP10 pad.TP11 pad.TP12 R3.2 R4.2 R5.2 SW1.2 U0.12 U0.18 U0.31 U0.47 U0.63 U1.2 U1.13 U2.3 U2.9 U3.13 U4.8 U4.9 U4.14 U4.21 U6#1.2 U6#1.3 U6#1.4 U6#1.6 U6#1.12 U6#2.2 U6#2.3 U6#2.4 U6#2.6 U6#2.12 | length 81.8
  Top Layer w0.2: U3.13 39.252,42.051 39.947,42.051 40.057,41.941 C20.1 40.678,41.921 41.679,41.921 v1(41.7,41.9) ; v1(93.9,38.85) 93.9,40.355 C18.2 93.9,40.418 v1(93.9,42.1) ; v1(98,39.5) 98.057,39.557 98.057,39.995 98.073,40.01 98.073,40.04 98.243,40.21 C16.2 ; v1(100.4,44.3) 100.457,44.243 100.729,44.243 100.846,44.125 100.846,43.6 101.04,43.406 101.04,43.219 101.24,43.019 101.24,42.936 101.34,42.836 101.34,41.436 U4.21 U4.8 103.764,41.036 103.928,41.2 v1(104,41.2) 103.943,41.257 103.719,41.257 103.54,41.436 U4.9 ; v1(103.4,42.4) 103.481,42.4 103.822,42.74 C19.1@104.038,42.74 ; v1(114.3,48.4) 114.3,48.332 114.828,47.804 C15.1 ; C7.1 116.236,33.389 116.467,33.157 116.843,33.157 v1(116.9,33.1) 116.9,33.154 117.496,33.75 C10.1 117.891,34.199 117.891,34.287 117.949,34.346 117.949,34.558 U0.31 ; LED1.1 LED1.6 119.901,55.831 120.55,55.831 120.719,56 v1(120.8,56) ; v1(122.561,25.105) 122.618,25.047 122.618,24.755 122.925,24.449 123.382,24.449 U1.2 ; LED2.6 123.5,55.89 124.009,55.89 124.219,56.1 v1(124.3,56.1) ; v1(126.2,23.2) 126.143,23.257 126.024,23.257 U1.13 126.183,25.7 v1(126.2,25.7) ; v1(126.3,21.8) 126.707,21.393 127.146,21.393 R3.2 ; U0.47 126.55,39.569 127.09,39.03 128.383,39.03 128.876,39.523 128.876,40.376 v1(128.9,40.4) ; LED3.6 126.815,55.815 127.685,55.815 v1(127.7,55.8) ; v1(130.8,23) 130.881,23 131.174,22.707 C13.1 131.9,22.687 D1.2 132.898,21.621 133.019,21.5 v1(133.1,21.5) ; C14.1 131.95,26.107 132.433,26.59 132.69,26.59 v1(133.1,27) ; v1(134.6,56.7) 135.096,56.204 SW1.2
  Top Layer w0.254: C22#1.1@5,40.314 5,40.767 v1(5.3,41.067) 5.3,41.006 5.681,40.625 5.681,40.586 5.953,40.314 7.347,40.314 U6#1.2 ; v1(6.295,41.167) U6#1.3 ; v1@6.314,41.948 7.381,41.948 U6#1.4 ; v1(8.2,38.5) U6#1.12 ; U6#1.6 v1(8.2,43.707) ; C22#2.1@47,15.947 47,16.4 v1(47.3,16.7) 47.3,16.639 47.681,16.258 47.681,16.219 47.953,15.947 49.347,15.947 U6#2.2 ; v1(48.295,16.8) U6#2.3 ; v1@48.314,17.581 49.381,17.581 U6#2.4 ; v1(50.2,14.133) U6#2.12 ; U6#2.6 v1(50.2,19.34) ; v1(111.6,47.7) 111.6,47.654 112.204,47.05 C8.1 113.37,45.838 113.37,45.608 U0.12 ; v1(111.7,37.1) C1.1 112.175,37.617 112.175,38.131 ; 112.174,38.131 112.174,38.319 112.689,38.834 113.001,38.834 113.736,39.569 U0.18 ; C11.1 120.602,49.5 120.955,49.853 121.253,49.853 v1(121.3,49.9) 121.63,50.23 C6.1 ; U0.63 v1(122.9,48.7) ; C12.1 v1(129.507,24.407)
  Top Layer w0.4: v1(133.1,21.5) 133.115,21.515 134.205,21.515 J0.B12 134.235,21.515 135.285,21.515 v1(135.3,21.5) ; v1(133.1,27) 133.115,27.015 134.205,27.015 J0.A12 134.235,27.015 135.285,27.015 v1(135.3,27)
  Top Layer w0.5: v1(78.302,50.158) 78.575,50.431 J5.2 ; v1(89.471,50.024) 89.6,50.153 J4.2 ; v1(100.327,50.05) 100.35,50.073 J3.2
  Bottom Layer w0.2: v1(134.5,40.2) J1.6
  other v1: 109.2,16.8 110.4,16.8 111.6,16.8 112.8,16.8 114,16.8 115.2,16.8 116.4,16.8 117.6,16.8 118.8,16.8 120,16.8 121.2,16.8 48.295,17.562 107.4,18 108.6,18 109.8,18 113.4,18 114.6,18 115.8,18 117,18 118.2,18 119.4,18 120.6,18 121.8,18 106.8,19.2 116.4,19.2 117.6,19.2 118.8,19.2 120,19.2 121.2,19.2 106.8,21.6 108,24 109.2,24 108.6,25.2 109.8,25.2 111,25.2 113.4,25.2 114.6,25.2 110.4,26.4 111.6,26.4 112.8,26.4 114,26.4 115.2,26.4 111,27.6 112.2,27.6 113.4,27.6 114.6,27.6 121.8,27.6 6.295,41.929 112.787,46.421
NetC7_2: C7.2 U0.30 | length 2
  Top Layer w0.2: C7.2 116.642,33.997 117.972,35.327 U0.30
NetC12_2: C12.2 D0.1 U1.8 | length 4.6
  Top Layer w0.2: U1.8 127.799,24.399 C12.2 127.807,24.437 128.317,24.947 129.27,24.947 129.28,24.957 129.743,24.957 130.293,24.407 D0.1
NetC13_2: C13.2 J0.A5 U1.7 | length 8.1
  Top Layer w0.2: U1.7 129.108,23.899 129.44,23.567 C13.2 134.007,23.567 J0.A5
NetC14_2: C14.2 J0.B5 U1.9 | length 8.2
  Top Layer w0.2: U1.9 126.607,24.899 126.955,25.247 129.145,25.247 129.155,25.257 129.859,25.257 129.869,25.247 C14.2 133.512,25.247 133.979,24.78 J0.B5
NetC15_2: C15.2 J1.9 SW1.1 U0.7 | length 40.4
  Top Layer w0.2: v1@115.457,48.743 v1(115.5,48.7) 115.457,48.657 115.457,47.15 C15.2 115.436,47.103 116.597,45.942 U0.7 ; v1@137.3,51.9 137.482,52.082 137.482,53.482 SW1.1
  Bottom Layer w0.2: v1@115.457,48.743 115.457,49.157 119,52.7 136.6,52.7 v1(137.4,51.9) 133.85,48.35 133.85,47.972 135.622,46.2 J1.9
NetC17_1: C17.1 U4.2 | length 1.1
  Top Layer w0.2: C17.1 101.321,39.217 101.34,39.236 U4.2
NetC21_2: C21.2 U4.13 | length 1.1
  Top Layer w0.2: U4.13 C21.2@101.74,43.6
NetJ1_3: J1.3 U0.46 | length 13.3
  Top Layer w0.2: U0.46 126.541,38.8 126.754,38.8 126.824,38.73 131.03,38.73 J1.3@136.8,44.5
NetJ1_4: J1.4 U0.49 | length 13.1
  Top Layer w0.2: U0.49 127.249,43.15 133.95,43.15 137,46.2 J1.4
NetJ1_7: J1.7 U0.8 | length 23.7
  Top Layer w0.2: U0.8 119.899,41.907 126.689,41.907 127.582,42.8 133.5,42.8 v1(133.9,42.4)
  Bottom Layer w0.2: v1(133.9,42.4) 136.9,42.4 137.6,41.7
NetJ1_8: J1.8 U0.9 | length 24.4
  Top Layer w0.2: U0.9 119.599,41.5 132.581,41.5 133,41.919 v1(133,42)
  Bottom Layer w0.2: v1(133,42) 133,42.7 134.44,44.14 J1.8@137.16,44.14
NetJ2_1: J2.1 J3.1 U4.15 | length 43.6
  Top Layer w0.3: 100.403,42.536 U4.15
  Top Layer w0.5: J2.1 89.45,42.05 91.3,43.9 v1(97.216,43.9) 99.04,43.9 100.403,42.536 ; v1(101.6,50) J3.1
  Bottom Layer w0.5: v1(97.216,43.9) 101.6,48.284 v1(101.6,50)
NetJ2_2: J2.2 J4.1 U4.17 | length 35.1
  Top Layer w0.2: 99.1,42.1 99.764,41.436 U4.17
  Top Layer w0.5: J2.2 91.49,40.8 ; v1(90.783,50.113) 90.783,51.833 J4.1
  Bottom Layer w0.5: v1(90.783,50.113) 91.433,49.463 v1(91.433,41.551)
NetJ2_3: J2.3 J5.1 U4.1 | length 46.9
  Top Layer w0.2: 99.7,39.5 99.736,39.536
  Top Layer w0.3: 99.736,39.536 U4.1
  Top Layer w0.5: J2.3 81.15,39.55 v1(81.4,39.8) 90.2,39.8 92.1,37.9 98.1,37.9 99.7,39.5 ; v1(79.8,50.369) 79.8,51.971 J5.1
  Bottom Layer w0.5: v1(79.8,50.369) 80.649,49.52 80.649,49.451 81.4,48.7 v1(81.4,39.8)
NetLED1_2: LED1.2 pad.TP1 U0.61 | length 14.2
  Top Layer w0.2: pad.TP1 118.07,55.3 118.17,55.2 LED1.2 119,55.2 119.234,54.966 119.234,54.444 119.467,54.21 119.99,54.21 123.7,50.5 123.7,49.574 123.694,49.567 123.694,48.633 123.7,48.626 123.7,48.087 U0.61
NetLED1_4: LED1.4 LED2.2 | length 2.3
  Top Layer w0.2: LED1.4 121.08,54.57 121.71,55.2 LED2.2
NetLED1_5: LED1.5 LED2.1 | length 2.3
  Top Layer w0.2: LED1.5 121.08,55.2 121.71,55.83 LED2.1
NetLED2_4: LED2.4 LED3.2 | length 2.1
  Top Layer w0.2: LED2.4 124.44,54.57 125.07,55.2 LED3.2
NetLED2_5: LED2.5 LED3.1 | length 2.1
  Top Layer w0.2: LED2.5 124.44,55.2 125.07,55.83 LED3.1
NetQ1_G: Q1.G U1.5 | length 1.3
  Top Layer w0.2: U1.5 124.891,22.94 124.891,21.659 Q1.G
NetR1_2: R1.2 R3.1 U1.6 | length 4
  Top Layer w0.2: U1.6 125.382,22.861 125.843,22.4 126.468,22.4 126.747,22.679 127.146,22.679 R3.1 R1.2
NetR2_2: R2.2 R5.1 U2.2 | length 3.8
  Top Layer w0.2: R2.2 111.766,23.192 R5.1 112.749,23.425 113.078,23.096 U2.2
NetR4_1: R4.1 U2.7 | length 1.4
  Top Layer w0.4: U2.7 116.4,24.501 R4.1
NetR8#1_2: R8#1.2 U0.54 U6#1.5 | length 150.9
  Top Layer w0.254: U6#1.5 7.4,44.367 R8#1.2 6.588,44.456 6.311,44.734 6.311,46.311 11.096,51.096 11.104,51.096 11.433,51.425 ccw(c10.637,52.223) 11.434,51.426 11.572,51.564 ccw(c10.777,52.363) 11.575,51.567 11.97,51.962 76.182,51.962 77.706,50.439 77.706,49.938 78.221,49.423 101.839,49.423 109.093,56.677 127.639,56.677 130.596,53.72 130.596,45.742 130.185,45.33 129.17,45.33 128.9,45.6 126.163,45.6 U0.54
NetR8#2_2: R8#2.2 U0.56 U6#2.5 | length 94.8
  Top Layer w0.254: v1(47.6,20.1) 47.611,20.089 R8#2.2 49.4,20 U6#2.5 ; v1(120.9,46.2) 120.9,45.384 122.461,43.823 123.139,43.823 123.541,44.225 123.541,44.392 U0.56
  Bottom Layer w0.254: v1(47.6,20.1) 48.208,20.708 48.208,20.973 63.058,35.823 113.057,35.823 115.077,37.843 115.077,40.377 v1(120.9,46.2)
NetR9#1_2: R9#1.2 U0.2 U6#1.7 | length 117.8
  Top Layer w0.254: v1(8.2,44.967) 8.2,44.908 8.547,44.561 8.984,44.561 R9#1.2 9,44.367 U6#1.7 ; R9#1.2@9.194,44.346 22.098,44.346 29.36,51.608 76.036,51.608 77.352,50.292 77.352,49.753 78.036,49.069 101.986,49.069 102.34,49.423 116.626,49.423 U0.2
  Bottom Layer w0.254: v1(8.2,44.967) 8.2,44.908 8.547,44.561
NetR9#2_2: R9#2.2 U0.60 U6#2.7 | length 87.8
  Top Layer w0.254: v1(50.2,20.6) 50.2,20.541 50.547,20.194 50.984,20.194 R9#2.2 51,20 U6#2.7 ; v1(121.5,45.6) 121.547,45.647 121.968,45.647 U0.60
  Bottom Layer w0.254: v1(50.2,20.6) 50.2,20.541 50.547,20.194 93.194,20.194 108.469,35.469 113.204,35.469 115.431,37.696 115.431,39.531 v1(121.5,45.6)
NetU0_10: pad.TP15 U0.10 U3.3 | length 100.5
  Top Layer w0.2: U3.3 30.673,41.527 29.9,42.3 29.9,44.2 30.6,44.9 34.079,44.9 36.96,47.781 49.9,47.781 50,47.781 ccw(c50,48.262) 50.481,48.262 50.481,49.136 cw(c50.962,49.136) 51.443,49.136 51.443,46.373 ccw(c51.924,46.373) 52.405,46.373 52.405,47.3 cw(c52.886,47.3) 52.886,47.781 53.602,47.781 74.16,47.781 74.628,48.25 112.142,48.25 U0.10
NetU0_11: pad.TP17 U0.11 U3.4 | length 105.6
  Top Layer w0.2: U3.4 35.932,40.876 45.308,31.5 65.833,31.5 66.042,31.291 66.391,31.291 66.6,31.5 66.809,31.291 67.158,31.291 67.367,31.5 118.602,31.5 120.4,33.298 120.4,39.5 116.4,43.5 116.185,43.5 U0.11
NetU0_15: U0.15 U4.4 | length 14.8
  Top Layer w0.2: U4.4 102.14,39.236 102.24,39.136 102.24,39.054 102.357,38.936 102.44,38.936 103.05,38.326 v1(107.261,38.326) ; v1(110.651,41.872) 112.341,43.562 113.082,43.562 113.141,43.503 113.353,43.503 U0.15
  Bottom Layer w0.2: v1(107.261,38.326) 110.594,41.659 110.594,41.815 v1(110.651,41.872)
NetU0_16: U0.16 U4.5 | length 12.9
  Top Layer w0.2: U4.5 104.283,39.536 104.571,39.248 105.436,39.248 105.498,39.31 v1(106.501,39.31) ; v1(112.145,42.588) 112.735,43.178 112.901,43.178 113.344,42.734 U0.16
  Bottom Layer w0.2: v1(106.501,39.31) 109.835,42.644 112.088,42.644 v1(112.145,42.588)
NetU0_17: pad.TP18 U0.17 U3.1 | length 90.6
  Top Layer w0.2: v1(32.039,42.761) 32.072,42.794 33.218,42.794 U3.1 ; v1(104.6,37.1) v1(108.5,37.1) ; v1(112,39.2) 112.692,39.2 U0.17
  Bottom Layer w0.2: v1(32.039,42.761) 31.961,42.761 30.85,41.65 30.85,38.272 32.022,37.1 v1(104.6,37.1) ; v1(108.5,37.1) 109.141,37.1 109.241,37 109.8,37 v1(112,39.2)
NetU0_22: U0.22 U4.6 | length 14.5
  Top Layer w0.2: U4.6 104.576,40.236 v1(104.98,39.833) ; v1(113.609,37.191) 113.65,37.231 114.259,37.231 U0.22
  Bottom Layer w0.2: v1(104.98,39.833) 104.98,39.83 108.41,36.4 113.172,36.4 113.313,36.541 113.313,36.814 113.609,37.11 v1(113.609,37.191)
NetU0_23: U0.23 U4.10 | length 15.6
  Top Layer w0.2: U4.10 105.177,41.836 111.164,35.85 113.585,35.85 U0.23
NetU0_26: U0.26 U4.7 | length 16
  Top Layer w0.2: U4.7 105.953,40.636 111.039,35.55 115.406,35.55 U0.26
NetU0_27: U0.27 U4.3 | length 17.7
  Top Layer w0.2: U4.3 101.74,39.236 101.84,39.136 101.84,39.029 102.233,38.636 102.257,38.636 105.644,35.25 115.813,35.25 U0.27
NetU0_29: pad.TP16 U0.29 U3.2 | length 101.5
  Top Layer w0.2: U3.2 31.224,42.176 30.7,42.7 30.7,43.4 30.998,43.698 46.754,43.698 46.854,43.698 ccw(c46.854,44.179) 47.335,44.179 47.335,45.905 cw(c47.816,45.905) 48.297,45.905 48.297,43.156 ccw(c48.778,43.156) 49.259,43.156 49.259,43.217 cw(c49.74,43.217) 49.74,43.698 50.863,43.698 54.354,43.698 63.983,34.068 64.732,34.068 pad.TP16 115.8,33.9 116.499,34.6 116.57,34.6 117.651,35.68 U0.29
NetU0_33: U0.33 U1.12 | length 10.7
  Top Layer w0.2: U0.33 121.945,34.204 121.945,34.134 121.65,33.838 121.65,29.576 121.945,29.281 v1@121.945,29.245 ; v1(124,27.5) 124,27.419 124.34,27.079 124.34,26.948 124.382,26.906 U1.12
  Bottom Layer w0.2: v1(121.923,29.223) 122.755,29.223 124,27.978 v1(124,27.5)
NetU0_34: U0.34 U1.10 | length 10.7
  Top Layer w0.2: U0.34 122.299,34.558 122.299,34.346 122.357,34.287 122.357,30.439 v1(122.2,30.281) ; v1(125.191,27.3) 125.191,27.219 125.382,27.027 U1.10
  Bottom Layer w0.2: v1(122.2,30.281) 125.181,27.3 v1@125.2,27.3
PG: pad.TP0@109.9,28.1 U2.8 | length 7.4
  Top Layer w0.2: pad.TP0@110.1,27.7 110.75,27.05 111.728,27.05 112.225,26.553 112.225,26.197 112.622,25.8 114.778,25.8 115.15,25.428 115.15,24.972 115.02,24.843 U2.8
SCL: pad.TP14 R6.2 U0.58 U6#1.10 U6#2.10 | length 150.7
  Top Layer w0.2: U6#1.10 15.464,40.367 43.899,11.932 51.06,11.932 52.401,13.273 52.401,14.599 U6#2.10 v1(52.8,16) ; v1(122.9,44.4) 122.9,45.165 U0.58 125.235,47.5 R6.2
  Bottom Layer w0.2: v1(52.8,16) 54.1,14.7 95.9,14.7 108.828,27.628 108.828,27.711 108.796,27.858 cw(c109.9,28.1) 110.258,29.172 110.289,29.172 110.372,29.172 122.9,41.7 v1(122.9,44.4)
SDA: pad.TP13 R7.2 U0.59 U6#1.9 U6#2.9 | length 144.2
  Top Layer w0.2: U6#1.9 23.001,41.167 34.142,30.026 43.772,30.026 51.795,22.003 51.795,17.595 U6#2.9 52.6,16.8 v1(53,17.2) ; v1(122.2,45.1) 122.2,45.136 123.298,46.234 U0.59 124.7,47.672 R7.2
  Bottom Layer w0.2: v1(53,17.2) 95.6,17.2 122.2,43.8 v1(122.2,45.1)
TSC/MISO: pad.TP20 U0.52 | length 50.3
  Top Layer w0.2: pad.TP20@93.049,25.549 97,29.5 107.118,29.5 107.918,30.3 118.624,30.3 120.124,31.8 v1(121,31.8) ; U0.52 126.188,44.21 126.4,44.21 126.59,44.4 127.141,44.4 127.6,44.859 v1(127.6,44.9)
  Bottom Layer w0.2: v1(121,31.8) 121.078,31.8 129.45,40.172 129.45,41.571 128,43.02 128,44.5 v1(127.6,44.9)
TSC/MOSI: pad.TP19 U0.53 | length 49.4
  Top Layer w0.2: pad.TP19@90.567,25.567 96,31 118.9,31 v1(121,33.1) ; U0.53 126.213,44.943 126.443,44.943 v1(126.5,45)
  Bottom Layer w0.2: v1(121,33.1) 126.8,38.9 126.8,44.7 v1(126.5,45)
TSC/SCK: pad.TP21 U0.51 | length 48.5
  Top Layer w0.2: pad.TP21 96.048,26 98.006,27.958 107.028,27.958 108.228,29.158 116.009,29.5 116.018,29.5 119.035,29.5 119.182,29.646 119.408,29.873 119.624,29.873 ccw(c119.59,30.07) 119.726,29.923 cw(c120.5,29.1) 120.478,30.23 120.648,30.4 v1(121,30.4) ; U0.51 126.197,43.442 126.855,44.1 127.7,44.1 128,44.4 v1(128.7,44.4)
  Bottom Layer w0.2: v1(121,30.4) 130.8,40.2 130.8,42.3 v1(128.7,44.4)
VBUS: D0.2 D1.1 J0.A9 J0.B9 pad.TP3 pad.TP4 pad.TP5 Q1.D R1.1 | length 0.9
  Top Layer w0.2: D0.2 v1(132.809,24.407)
  other v1: 123.6,19.2 124.8,19.2 126,19.2 127.2,19.2 128.4,19.2 129.6,19.2 129,20.4 130.2,20.4
VH: C2.2 C3.2 C16.1 C17.2 C18.1 pad.TP6 Q1.S U1.4 U2.6 U4.18 | length 7.8
  Top Layer w0.2: v1(101.3,36.55) 101.3,37.513 C17.2 ; 119.7,27.5 120.251,28.051 120.251,28.851 pad.TP6 ; 120.2,22.4 120.2,22.43 120.849,23.079 C2.2 ; Q1.S@123.02,21.65 123.04,21.67 123.94,21.67 123.96,21.69 124.12,21.69 124.26,21.83 124.26,22.102 124.382,22.224 U1.4
  Top Layer w0.4: U2.6 116.582,23.433 117.64,23.433 117.658,23.415 C3.2@117.658,23.186
  other v1: 121.8,22.4 121.1,23.8 121.8,23.8 120.75,24.5 121.45,24.5 118.3,25.2 119,25.2 119.7,25.2 120.4,25.2 121.1,25.2 118.65,25.9 119.35,25.9 120.05,25.9 120.75,25.9 118.3,26.6 119,26.6 119.7,26.6 120.4,26.6 118.65,27.3 119.35,27.3 120.05,27.3 99.289,40.387 99.289,41.022 98,41.8
Z: pad.TP22 U0.21 U3.14 | length 103.6
  Top Layer w0.2: U3.14 44.374,42.827 54.75,32.45 118.072,32.45 118.372,32.15 118.828,32.15 119.9,33.222 119.9,38.883 119.783,39 115.533,39 115.457,38.924 115.245,38.924 U0.21 ; pad.TP22 88.5,30.5 v1(88.8,30.8)
  Bottom Layer w0.2: v1(88.8,30.8) 90,32 v1(90,32.4)
pads on no net: J0.7 J0.8 J0.9 J0.10 J1.1 J1.2 J1.5 J2.4 J2.5 J3.3 J3.4 J4.3 J4.4 J5.3 J5.4 LED3.4 LED3.5 SW1.4 U0.3 U0.4 U0.5 U0.6 U0.20 U0.24 U0.25 U0.28 U0.37 U0.38 U0.39 U0.40 U0.41 U0.42 U0.43 U0.44 U0.45 U0.62 U2.1 U2.5 U3.5 U3.8 U3.9 U3.10 U4.16 U4.19 U4.20 U6#1.8 U6#2.8

## Polygon pours and split planes (outlines as drawn)
VH on Top Layer "VH_L01_P002" (solid, pour order 2): 117.4,27.4 117.4,22.9 118.4,21.9 121.4,21.9 122.1,21.2 124.5,21.2 124.5,23.6 124.4,23.7 122.806,23.7 120.029,27.8 117.8,27.8
VBUS on Top Layer "VBUS_L01_P000" (solid, pour order 0): 130.9,19.7 129.8,18.6 123.2,18.6 122.1,19.7 122.1,21.2 126,21.2 126.8,20.4 128.1,20.4 128.1,22.1 128.2,22.2 129.9,22.2 130.9,21.2
3V3 on Top Layer "3V3_L01_P003" (solid, pour order 3): 109.2,22.7 115.2,22.7 115.2,19.1 107.3,19.1 107.3,22.7
GND on Top Layer "GND_L01_P004" (solid, pour order 4): 112,29 106,23 106,18.8 108.7,16.1 122.1,16.1 122.1,25.3 118.4,29
NetJ2_2 on Top Layer "NONET_L01_P-001" (solid, pour order 6): 100.7,41.375 100.564,41.136 99.464,41.136 98.4,42.2 93.2,42.2 92.9,41.9 92.9,40.4 90.8,40.4 90.4,40.9 90.4,41 90.4,42.3 91.5,43.4 98.9,43.4 100.3,42 100.7,42
VH on Top Layer "VH_L01_P005" (solid, pour order 5): 95,42.2 98.6,42.2 99.3,41.3 100.8,41.3 100.8,40.2 100.7,40.1 99.1,40.1 97.5,38.5 95,38.5
VBUS on Top Layer "VBUS_L01_P001" (solid, remove dead copper, pour order 1): 133.512,26.2 133.512,22.312 132.4,21.2 130.9,21.2 130.9,19.6 132.2,18.3 135.4,18.3 136.8,19.7 136.8,25 135.6,26.2
GND on Layer 1 (split plane): 134.689,58.49 134.75,58.477 134.807,58.454 134.859,58.419 134.88,58.398 140.327,52.951 140.366,52.913 140.426,52.822 140.468,52.721 140.49,52.613 140.49,52.559 140.49,44.01 138.2,44.01 138.14,44.01 138.1,44.007 138.041,44.001 138.024,43.996 137.945,43.972 137.835,43.926 137.746,43.879 137.669,43.815 137.585,43.731 137.521,43.654 137.474,43.565 137.428,43.455 137.413,43.404 137.399,43.359 137.39,43.26 137.39,43.14 137.399,43.041 137.413,42.996 137.428,42.945 137.474,42.835 137.521,42.746 137.585,42.669 137.669,42.585 137.746,42.521 137.835,42.474 137.945,42.428 138.024,42.404 138.041,42.399 138.1,42.393 138.14,42.39 138.2,42.39 140.49,42.39 140.49,15 140.49,14.706 140.413,14.122 140.26,13.554 140.035,13.01 139.741,12.5 139.383,12.033 138.966,11.617 138.5,11.259 137.99,10.965 137.446,10.74 136.878,10.587 136.294,10.51 136,10.51 9,10.51 8.706,10.51 8.122,10.587 7.554,10.74 7.01,10.965 6.5,11.259 6.033,11.617 5.617,12.033 5.259,12.5 4.965,13.01 4.74,13.554 4.587,14.122 4.51,14.706 4.51,15 4.51,54 4.51,54.294 4.587,54.878 4.74,55.446 4.965,55.99 5.259,56.5 5.617,56.967 6.033,57.383 6.5,57.741 7.01,58.035 7.554,58.26 8.122,58.413 8.706,58.49 9,58.49 134.659,58.49
3V3 on Layer 2 (split plane): 134.689,58.49 134.75,58.477 134.807,58.454 134.859,58.419 134.88,58.398 140.327,52.951 140.366,52.913 140.426,52.822 140.468,52.721 140.49,52.613 140.49,52.559 140.49,44.01 138.2,44.01 138.14,44.01 138.1,44.007 138.041,44.001 138.024,43.996 137.945,43.972 137.835,43.926 137.746,43.879 137.669,43.815 137.585,43.731 137.521,43.654 137.474,43.565 137.428,43.455 137.413,43.404 137.399,43.359 137.39,43.26 137.39,43.14 137.399,43.041 137.413,42.996 137.428,42.945 137.474,42.835 137.521,42.746 137.585,42.669 137.669,42.585 137.746,42.521 137.835,42.474 137.945,42.428 138.024,42.404 138.041,42.399 138.1,42.393 138.14,42.39 138.2,42.39 140.49,42.39 140.49,31.129 125,31.129 124.95,31.12 124.908,31.092 122.208,28.392 122.18,28.35 122.171,28.3 122.171,26.143 121.107,27.207 114.307,34.007 114.276,34.031 114.239,34.046 114.2,34.051 108.863,34.051 100.107,42.807 100.076,42.831 100.061,42.837 100.039,42.846 100,42.851 92.4,42.851 92.361,42.846 92.324,42.831 92.293,42.807 92.269,42.776 92.254,42.739 92.249,42.7 92.249,37.6 92.254,37.561 92.263,37.539 92.269,37.524 92.293,37.493 93.193,36.593 93.224,36.569 93.235,36.565 93.261,36.554 93.3,36.549 98.837,36.549 106.693,28.693 106.724,28.669 106.761,28.654 106.8,28.649 111.837,28.649 122.171,18.316 122.171,11.354 121.327,10.51 9,10.51 8.706,10.51 8.122,10.587 7.554,10.74 7.01,10.965 6.5,11.259 6.033,11.617 5.617,12.033 5.259,12.5 4.965,13.01 4.74,13.554 4.587,14.122 4.51,14.706 4.51,15 4.51,54 4.51,54.294 4.587,54.878 4.74,55.446 4.965,55.99 5.259,56.5 5.617,56.967 6.033,57.383 6.5,57.741 7.01,58.035 7.554,58.26 8.122,58.413 8.706,58.49 9,58.49 134.659,58.49